# Altium PCB ProPrj_HTXStudio_OneHanded_Keyboard(1).PcbDoc (part 10 of 11)
Units mm, origin at the board's own origin, x right, y up, seen from the top; angles counter-clockwise.
Board outline 152.4 x 101.6 mm, 20 copper layers (F.Cu, F.Mask, B.Cu, B.Mask, In1.Cu, F.SilkS, In2.Cu, B.SilkS, F.Adhes, B.Adhes, F.Paste, B.Paste, Dwgs.User, Cmts.User, Eco1.User, Eco2.User, Edge.Cuts, Margin, B.CrtYd, F.CrtYd); 269 components, 0 nets, 747 pads, 1168 vias.
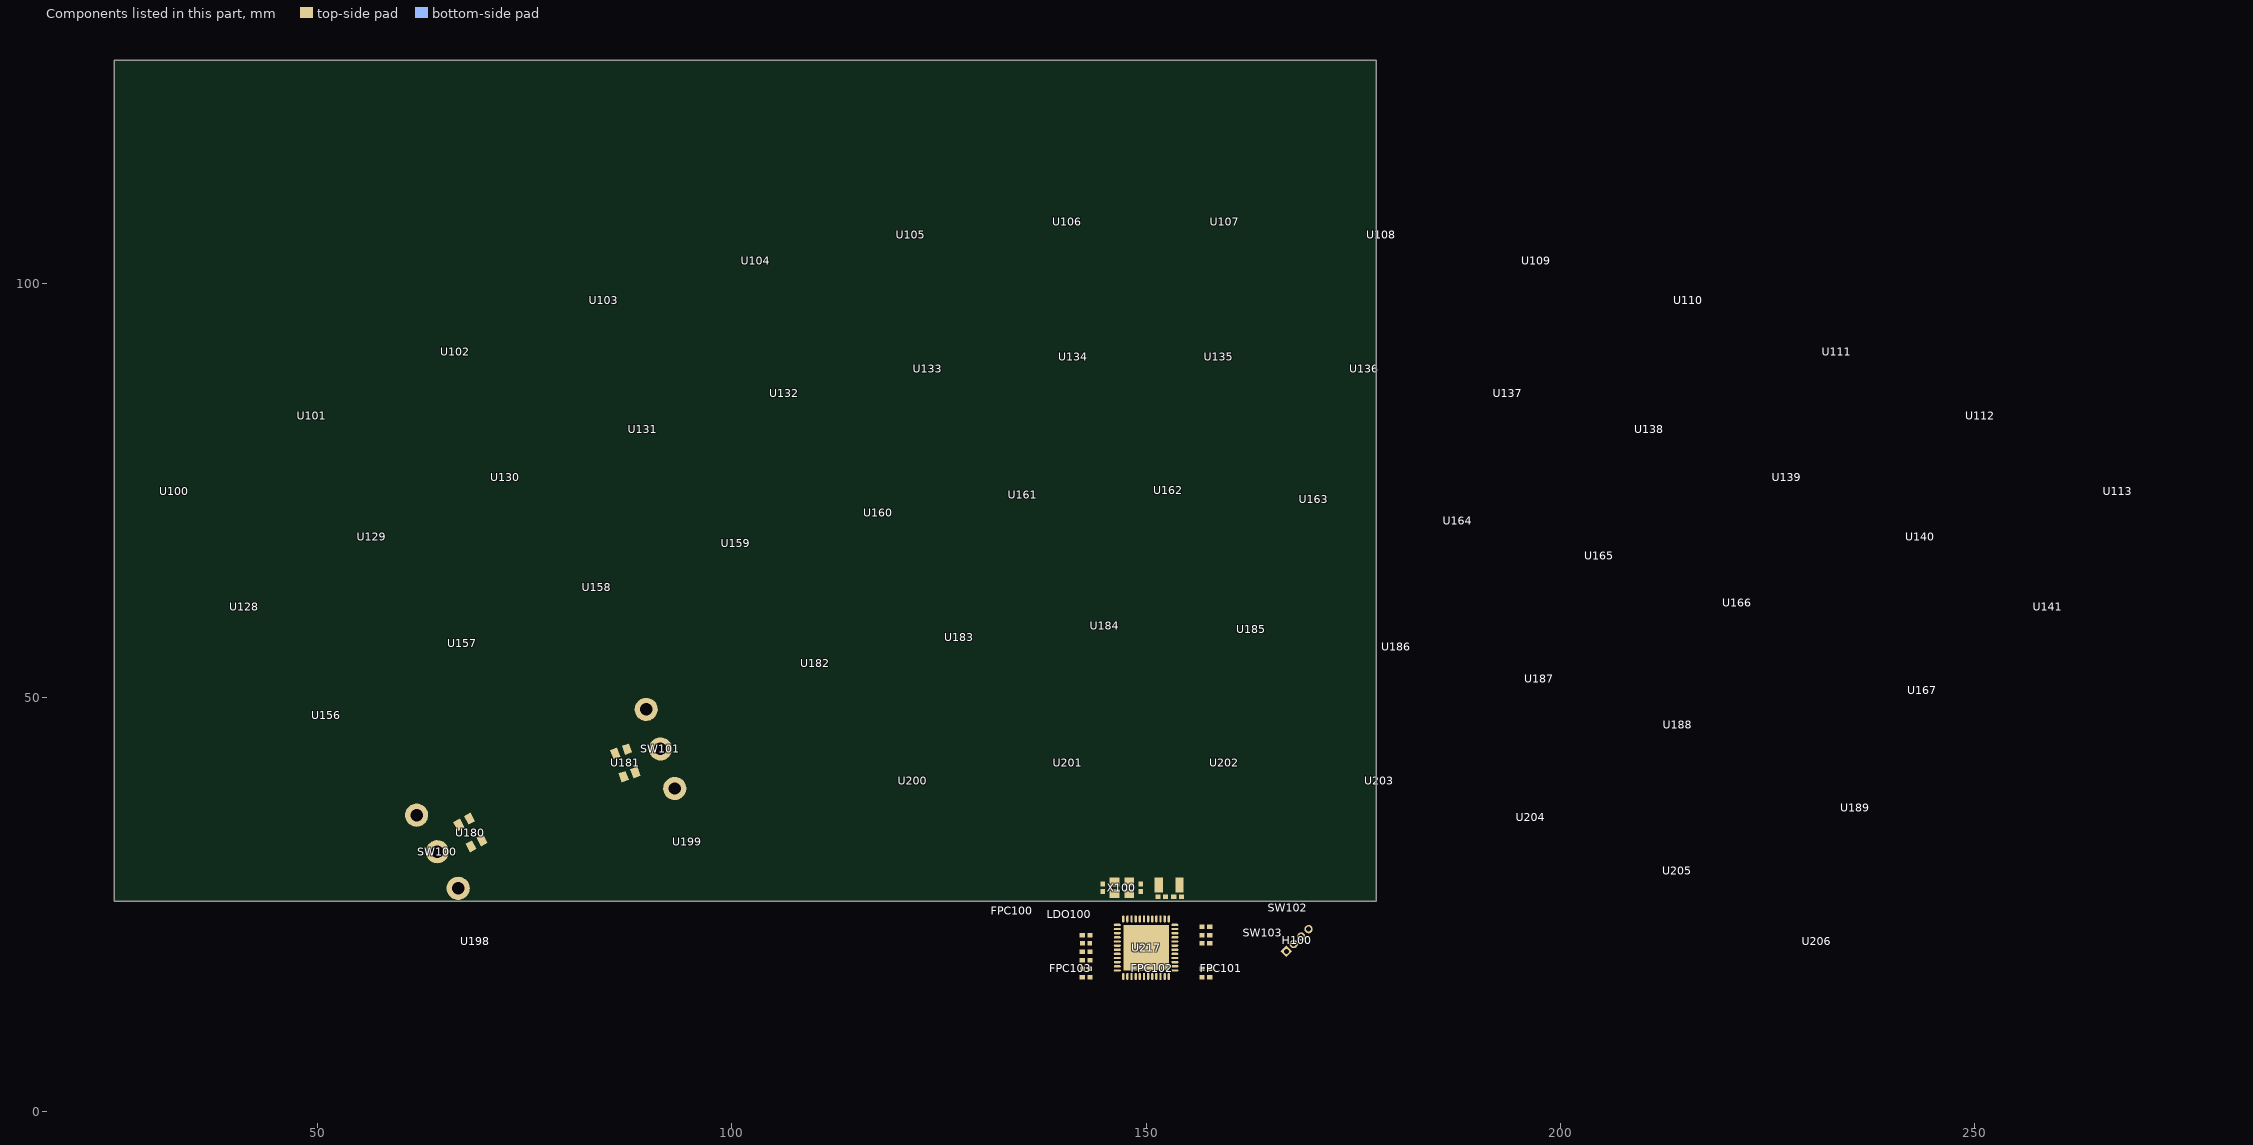
[diagram p22: the components of this part, seen from the top]

## Via types
v1: diameter 0.5, hole 0.3, F.Cu to B.Cu, tented both sides, 1168 vias

## Nets (pads, with @x,y where several pads share a name; then routed paths per layer and width w, separated by ;. In a path a pad name is that pad's centre, name@x,y a point inside that pad or via, vN(x,y) a via of type N, cw(c..) or ccw(c..) an arc to the next point about the centre after c; other vN are vias at no path point) (continued)
copper on no net: (continued)
  Eco2.User w0.254: 31.728,59.777 cw(c150.022,-118.903) 46.478,68.71 ; 31.728,59.777 cw(c150.022,-118.903) 46.478,68.71 ; 31.728,59.777 23.246,72.59 cw(c149.958,-118.802) 39.054,82.164 46.478,68.711 ; 40.737,46.17 cw(c149.966,-118.815) 54.361,54.421 ; 40.737,46.17 cw(c149.966,-118.815) 54.361,54.421 ; 40.737,46.17 32.249,58.991 cw(c149.952,-118.793) 46.931,67.883 54.361,54.421 ; 47.092,69.047 cw(c150.012,-118.893) 62.538,76.715 ; 47.092,69.047 cw(c150.012,-118.893) 62.538,76.715 ; 47.092,69.047 39.711,82.525 cw(c149.942,-118.757) 56.265,90.743 62.538,76.715 ; 49.746,32.562 cw(c150.006,-118.879) 65.007,41.625 ; 49.746,32.562 cw(c150.006,-118.879) 65.007,41.625 ; 49.746,32.562 41.251,45.393 cw(c150.02,-118.9) 57.805,55.224 65.006,41.625 ; 54.93,54.734 cw(c149.982,-118.835) 69.197,61.816 ; 54.93,54.734 cw(c149.982,-118.835) 69.197,61.816 ; 54.93,54.734 47.545,68.22 cw(c150.04,-118.946) 62.92,75.852 69.197,61.816 ; 58.754,18.954 cw(c149.999,-118.867) 104.508,40.038 ; 58.754,18.954 cw(c149.999,-118.867) 104.508,40.038 ; 58.754,18.954 50.253,31.796 cw(c149.994,-118.858) 100.268,54.844 104.507,40.039 ; 63.177,77 cw(c150.013,-118.899) 79.21,83.348 ; 63.177,77 cw(c150.013,-118.899) 79.21,83.348 ; 63.177,77 56.95,91.048 cw(c149.953,-118.757) 74.133,97.851 79.21,83.348 ; 65.595,41.935 cw(c150.051,-118.97) 79.902,48.668 ; 65.595,41.935 cw(c150.051,-118.97) 79.902,48.668 ; 65.595,41.935 58.444,55.56 cw(c150.041,-118.952) 73.963,62.863 79.902,48.668 ; 68.082,5.558 cw(c149.99,-118.852) 82.504,13.935 ; 68.082,5.558 cw(c149.99,-118.852) 82.504,13.935 ; 68.083,5.558 59.605,18.434 cw(c150.045,-118.942) 75.52,27.678 82.505,13.935 ; 69.791,62.08 cw(c149.979,-118.819) 84.6,67.944 ; 69.791,62.08 cw(c149.979,-118.819) 84.6,67.944 ; 69.791,62.08 63.559,76.137 cw(c150.015,-118.905) 79.519,82.457 84.6,67.944 ; 79.872,83.578 cw(c149.988,-118.833) 96.38,88.562 ; 79.872,83.578 cw(c149.988,-118.833) 96.38,88.562 ; 79.871,83.578 74.841,98.098 cw(c149.991,-118.841) 92.534,103.439 96.379,88.562 ; 80.516,48.924 cw(c149.922,-118.667) 95.375,54.331 ; 80.516,48.924 cw(c149.922,-118.667) 95.375,54.331 ; 80.516,48.924 74.63,63.14 cw(c150.002,-118.874) 90.746,69.006 95.375,54.331 ; 83.159,14.265 cw(c150.003,-118.876) 115.119,25.961 ; 83.159,14.265 cw(c150.003,-118.876) 115.119,25.961 ; 83.159,14.265 76.242,28.043 cw(c150.011,-118.894) 111.509,40.949 115.119,25.962 ; 85.213,68.157 cw(c150.043,-119.002) 100.461,72.761 ; 85.213,68.157 cw(c150.043,-119.002) 100.461,72.761 ; 85.213,68.157 80.18,82.686 cw(c149.994,-118.85) 96.613,87.648 100.461,72.761 ; 96.01,54.53 cw(c150.013,-118.915) 111.297,58.569 ; 96.01,54.53 cw(c150.013,-118.915) 111.297,58.569 ; 96.01,54.53 91.435,69.222 cw(c149.976,-118.784) 108.018,73.604 111.297,58.569 ; 97.058,88.736 cw(c149.96,-118.698) 113.925,92.321 ; 97.058,88.736 cw(c149.96,-118.698) 113.925,92.321 ; 97.057,88.736 93.26,103.626 cw(c150.017,-118.94) 111.338,107.468 113.925,92.321 ; 101.091,72.923 cw(c149.983,-118.794) 116.67,76.234 ; 101.091,72.923 cw(c149.983,-118.794) 116.67,76.234 ; 101.09,72.923 97.29,87.822 cw(c149.993,-118.837) 114.081,91.391 116.67,76.234 ; 105.204,40.236 cw(c150.021,-118.951) 120.518,43.771 ; 105.204,40.236 cw(c150.021,-118.951) 120.518,43.771 ; 105.204,40.236 101.03,55.06 cw(c149.963,-118.726) 117.771,58.925 120.518,43.771 ; 111.948,58.71 cw(c149.976,-118.743) 127.538,61.347 ; 111.948,58.71 cw(c149.976,-118.743) 127.538,61.347 ; 111.948,58.71 108.724,73.756 cw(c150.023,-118.989) 125.635,76.617 127.538,61.347 ; 114.615,92.438 cw(c149.974,-118.695) 131.723,94.599 ; 114.615,92.438 cw(c149.974,-118.695) 131.723,94.599 ; 114.615,92.438 112.078,107.593 cw(c150.025,-119.037) 130.412,109.91 131.724,94.599 ; 115.832,26.131 cw(c150.024,-118.986) 132.255,29.042 ; 115.832,26.131 cw(c150.024,-118.986) 132.255,29.042 ; 115.832,26.131 112.296,41.137 cw(c149.986,-118.802) 130.418,44.348 132.255,29.042 ; 117.311,76.343 cw(c150.007,-118.919) 133.113,78.34 ; 117.311,76.343 cw(c150.007,-118.919) 133.113,78.34 ; 117.31,76.343 114.771,91.508 cw(c150,-118.869) 131.801,93.66 133.113,78.339 ; 121.227,43.898 cw(c150.003,-118.887) 136.817,45.895 ; 121.227,43.898 cw(c150.003,-118.887) 136.817,45.895 ; 121.227,43.898 118.547,59.064 cw(c150.004,-118.892) 135.589,61.247 136.817,45.895 ; 128.199,61.428 cw(c150.003,-118.898) 143.964,62.641 ; 128.199,61.428 cw(c150.003,-118.898) 143.964,62.641 ; 128.199,61.428 126.351,76.704 cw(c149.987,-118.737) 143.453,78.02 143.964,62.641 ; 132.421,94.658 cw(c149.996,-118.797) 149.65,95.38 ; 132.421,94.658 cw(c149.996,-118.797) 149.65,95.38 ; 132.421,94.658 131.16,109.972 cw(c150.003,-118.915) 149.625,110.747 149.65,95.38 ; 132.983,29.127 cw(c149.995,-118.816) 149.633,30.102 ; 132.983,29.127 cw(c149.995,-118.816) 149.633,30.102 ; 132.983,29.127 131.222,44.443 cw(c149.998,-118.842) 149.595,45.518 149.632,30.102 ; 133.76,78.393 cw(c149.996,-118.808) 149.674,79.06 ; 133.76,78.393 cw(c149.996,-118.808) 149.674,79.06 ; 133.76,78.393 132.499,93.718 cw(c150.003,-118.923) 149.649,94.437 149.674,79.06 ; 137.536,45.951 cw(c149.995,-118.772) 153.247,46.39 ; 137.536,45.951 cw(c149.995,-118.772) 153.247,46.39 ; 137.536,45.951 136.374,61.308 cw(c150.009,-119.041) 153.549,61.788 153.247,46.39 ; 144.63,62.662 cw(c149.999,-118.8) 160.44,62.441 ; 144.63,62.662 cw(c149.999,-118.8) 160.44,62.441 ; 144.629,62.662 144.174,78.042 cw(c150,-118.906) 161.324,77.803 160.439,62.441 ; 150.324,79.06 cw(c149.995,-119.113) 166.238,78.394 ; 150.324,79.06 cw(c149.995,-119.113) 166.238,78.394 ; 150.323,79.06 150.349,94.437 cw(c150.004,-118.691) 167.499,93.718 166.238,78.394 ; 150.35,95.38 cw(c149.998,-118.936) 167.579,94.658 ; 150.35,95.38 cw(c149.998,-118.936) 167.579,94.658 ; 150.35,95.38 150.375,110.746 cw(c150.001,-118.817) 168.84,109.972 167.579,94.658 ; 150.366,30.102 cw(c150,-118.868) 167.016,29.127 ; 150.366,30.102 cw(c150,-118.868) 167.016,29.127 ; 150.366,30.102 150.403,45.518 cw(c150.001,-118.824) 168.777,44.443 167.016,29.127 ; 153.968,46.374 cw(c150.004,-118.792) 169.644,45.25 ; 153.968,46.374 cw(c150.004,-118.792) 169.644,45.25 ; 153.968,46.374 154.337,61.77 cw(c150,-118.871) 171.474,60.542 169.644,45.25 ; 161.104,62.402 cw(c149.984,-119.057) 176.829,60.749 ; 161.104,62.402 cw(c149.984,-119.057) 176.829,60.749 ; 161.104,62.401 162.045,77.76 cw(c150.003,-118.837) 179.102,75.967 176.829,60.749 ; 167.744,29.042 cw(c150.008,-118.816) 184.166,26.131 ; 167.744,29.042 cw(c150.008,-118.816) 184.166,26.131 ; 167.744,29.042 169.58,44.349 cw(c149.995,-118.899) 187.702,41.137 184.166,26.131 ; 168.199,93.659 cw(c150,-118.868) 185.229,91.508 ; 168.199,93.659 cw(c150,-118.868) 185.229,91.508 ; 168.199,93.659 166.887,78.339 cw(c150.005,-118.818) 182.689,76.343 185.229,91.508 ; 168.277,94.599 cw(c149.982,-119.04) 185.385,92.438 ; 168.277,94.599 cw(c149.982,-119.04) 185.385,92.438 ; 168.277,94.599 169.587,109.91 cw(c150.019,-118.696) 187.922,107.593 185.385,92.438 ; 170.359,45.163 cw(c150.016,-118.764) 185.847,42.488 ; 170.359,45.163 cw(c150.016,-118.764) 185.847,42.488 ; 170.359,45.163 172.257,60.446 cw(c149.999,-118.878) 189.187,57.522 185.847,42.488 ; 177.488,60.649 cw(c150.02,-118.754) 192.998,57.578 ; 177.488,60.649 cw(c150.02,-118.754) 192.998,57.578 ; 177.488,60.649 179.816,75.859 cw(c149.996,-118.889) 196.641,72.528 192.998,57.578 ; 184.88,25.962 cw(c150.001,-118.863) 200.85,21.155 ; 184.88,25.962 cw(c150.001,-118.863) 200.85,21.155 ; 184.88,25.962 188.489,40.95 cw(c150.003,-118.857) 206.113,35.646 200.85,21.155 ; 185.919,91.391 cw(c149.994,-118.9) 202.71,87.822 ; 185.919,91.391 cw(c149.994,-118.9) 202.71,87.822 ; 185.919,91.391 183.33,76.234 cw(c149.986,-118.944) 198.909,72.923 202.71,87.822 ; 186.075,92.321 cw(c149.968,-119.036) 202.943,88.736 ; 186.075,92.321 cw(c149.968,-119.036) 202.943,88.736 ; 186.075,92.321 188.663,107.468 cw(c150.015,-118.793) 206.74,103.626 202.942,88.736 ; 186.551,42.33 cw(c149.981,-118.944) 201.696,38.13 ; 186.551,42.33 cw(c149.981,-118.944) 201.696,38.13 ; 186.551,42.33 189.956,57.349 cw(c150.001,-118.864) 206.512,52.758 201.695,38.13 ; 193.645,57.419 cw(c149.962,-119.009) 208.813,52.955 ; 193.645,57.419 cw(c149.962,-119.009) 208.813,52.955 ; 193.644,57.419 197.342,72.355 cw(c149.961,-119.011) 213.796,67.513 208.813,52.955 ; 201.539,20.903 cw(c149.99,-118.893) 216.84,14.266 ; 201.539,20.903 cw(c149.99,-118.893) 216.84,14.266 ; 201.538,20.903 206.872,35.368 cw(c150.027,-118.801) 223.756,28.044 216.84,14.266 ; 202.38,37.903 cw(c149.982,-118.918) 217.033,32.219 ; 202.38,37.903 cw(c149.982,-118.918) 217.033,32.219 ; 202.38,37.903 207.26,52.51 cw(c150.058,-118.708) 223.278,46.296 217.033,32.219 ; 203.387,87.648 cw(c149.995,-118.888) 219.82,82.686 ; 203.387,87.648 cw(c149.995,-118.888) 219.82,82.686 ; 203.387,87.648 199.539,72.761 cw(c150.038,-118.735) 214.787,68.158 219.82,82.686 ; 203.621,88.562 cw(c149.991,-118.902) 220.129,83.578 ; 203.621,88.562 cw(c149.991,-118.902) 220.129,83.578 ; 203.62,88.562 207.466,103.439 cw(c149.993,-118.892) 225.159,98.098 220.129,83.578 ; 209.442,52.738 cw(c149.942,-119.024) 224.143,46.918 ; 209.442,52.738 cw(c149.942,-119.024) 224.143,46.918 ; 209.442,52.738 214.478,67.278 cw(c150.003,-118.859) 230.426,60.964 224.143,46.917 ; 217.494,13.935 cw(c150.017,-118.837) 231.916,5.558 ; 217.494,13.935 cw(c150.017,-118.837) 231.916,5.558 ; 217.494,13.935 224.478,27.679 cw(c149.969,-118.925) 240.393,18.435 231.916,5.558 ; 220.481,82.457 cw(c150.014,-118.832) 236.44,76.138 ; 220.481,82.457 cw(c150.014,-118.832) 236.44,76.138 ; 220.481,82.457 215.4,67.944 cw(c149.981,-118.919) 230.21,62.08 236.44,76.137 ; 223.993,45.977 cw(c149.981,-118.908) 249.744,31.798 ; 223.993,45.977 cw(c149.981,-118.908) 249.744,31.798 ; 223.993,45.978 217.687,31.927 cw(c149.992,-118.885) 241.243,18.956 249.744,31.798 ; 224.75,46.645 cw(c149.998,-118.872) 250.254,32.563 ; 224.75,46.645 cw(c149.998,-118.872) 250.254,32.563 ; 224.751,46.644 231.084,60.668 cw(c150.013,-118.843) 258.749,45.393 250.254,32.562 ; 225.867,97.851 cw(c149.959,-118.979) 243.05,91.048 ; 225.867,97.851 cw(c149.959,-118.979) 243.05,91.048 ; 225.867,97.851 220.79,83.348 cw(c150.013,-118.833) 236.823,77 243.05,91.048 ; 237.08,75.852 cw(c150.037,-118.789) 252.455,68.22 ; 237.08,75.852 cw(c150.037,-118.789) 252.455,68.22 ; 237.08,75.853 230.803,61.816 cw(c149.984,-118.903) 245.069,54.734 252.455,68.22 ; 243.735,90.743 cw(c149.949,-118.977) 260.289,82.526 ; 243.735,90.743 cw(c149.949,-118.977) 260.289,82.526 ; 243.735,90.742 237.462,76.715 cw(c150.013,-118.842) 252.909,69.047 260.289,82.525 ; 253.069,67.883 cw(c149.956,-118.945) 267.751,58.991 ; 253.069,67.883 cw(c149.956,-118.945) 267.751,58.991 ; 253.069,67.883 245.639,54.421 cw(c149.969,-118.923) 259.263,46.17 267.751,58.991 ; 260.946,82.164 cw(c149.962,-118.934) 276.754,72.59 ; 260.946,82.164 cw(c149.962,-118.934) 276.754,72.59 ; 260.947,82.164 253.522,68.711 cw(c150.022,-118.831) 268.272,59.777 276.755,72.59
  Edge.Cuts w0.254: 21.522,71.608 cw(c23.204,72.888) 22.023,74.64 cw(c150,-118.868) 277.986,74.634 cw(c276.796,72.888) 278.479,71.608 232.268,3.098 cw(c231.103,3.876) 230.249,2.766 ccw(c150.001,-118.865) 174.072,24.851 163.005,13.783 137.005,13.783 125.935,24.852 ccw(c150,-118.868) 69.751,2.766 cw(c68.897,3.875) 67.732,3.098 21.521,71.608
  other v1: 70.117,4.83 72.809,5.529 66.815,5.973 227.724,6.227 232.042,7.497 65.545,7.624 221.882,9.275 74.49,9.948 228.994,10.418 218.199,11.053 226.327,11.307 84.176,11.761 69.228,12.831 78.245,12.831 75.324,13.466 210.798,14.175 146.866,14.708 147.543,14.708 148.222,14.708 148.9,14.708 236.614,14.863 139.92,15.117 140.535,15.117 141.151,15.117 141.765,15.117 86.061,15.304 159.344,15.334 231.661,15.625 225.184,15.752 92.839,15.777 159.037,15.879 159.652,15.879 160.267,15.879 65.164,16.133 84.087,16.133 164.033,16.242 135.522,16.26 239.916,16.895 204.107,17.033 134.252,17.53 140.924,17.616 137.591,17.653 147.562,17.739 148.177,17.739 148.792,17.739 149.407,17.739 150.022,17.739 150.637,17.739 152.285,17.759 163.047,17.911 163.662,17.911 164.277,17.911 164.892,17.911 221.882,18.038 89.051,18.176 152.354,18.374 214.262,18.419 58.179,18.546 86.881,18.546 62.497,18.673 64.783,18.927 197.666,19.425 210.198,19.435 102.39,19.463 131.966,19.689 235.471,19.816 134.433,19.842 164.634,20.214 133.998,20.277 152.337,20.386 137.935,20.578 165.069,20.649 158.188,20.984 137.5,21.012 152.337,21.001 74.435,21.086 165.504,21.084 60.846,21.213 192.044,21.236 137.065,21.447 83.833,21.594 211.087,21.594 152.337,21.616 138.362,21.804 197.086,21.808 130.061,21.848 142.281,21.843 223.533,22.102 148.033,22.23 148.648,22.23 149.263,22.23 149.878,22.23 150.492,22.23 151.107,22.23 151.722,22.23 152.337,22.23 111.385,22.254 138.362,22.419 104.029,22.488 187.358,22.557 55.512,22.61 88.278,22.737 129.133,22.775 72.53,22.864 237.122,22.864 242.202,22.864 138.362,23.033 77.483,23.118 128.699,23.21 99.835,23.245 128.264,23.645 135.584,23.648 138.362,23.648 200.703,23.749 162.995,23.787 167.419,23.952 220.866,24.007 127.829,24.079 227.216,24.134 163.429,24.349 167.853,24.388 168.468,24.388 120.531,24.409 169.968,24.435 127.394,24.515 94.12,24.769 129.68,24.769 61.608,25.023 153.937,25.023 216.802,25.023 151.864,25.049 176.066,25.067 205.118,25.15 151.07,25.213 193.942,25.277 80.503,25.38 128.918,25.404 172.946,25.416 114.705,25.489 144.158,25.531 155.842,25.531 130.061,25.658 143.269,25.658 74.128,25.691 223.684,26.115 235.598,26.166 156.096,26.547 210.198,27.182 195.129,27.253 85.103,27.436 156.223,27.436 231.407,27.436 152.776,27.544 142.888,27.69 89.41,27.804 112.027,27.817 80.023,28.198 156.223,28.198 108.344,28.452 144.156,28.608 180.866,28.709 69.863,28.833 142.634,29.087 150.508,29.087 159.652,29.087 123.965,29.214 155.715,29.214 201.816,29.214 245.504,29.214 92.977,29.341 153.937,29.468 73.165,29.595 127.394,29.595 83.706,29.722 178.194,29.722 57.544,29.849 191.021,29.849 127.648,30.357 54.242,30.484 75.832,30.484 161.43,30.611 162.192,30.611 162.954,30.611 242.71,30.738 187.741,30.821 113.043,30.865 164.351,30.865 140.729,30.935 141.491,30.935 142.253,30.935 143.015,30.935 143.777,30.935 157.874,30.992 154.361,31.119 147.432,31.5 221.755,31.627 141.11,31.754 141.872,31.754 142.634,31.754 143.396,31.754 239.408,31.754 249.568,31.754 129.807,32.008 88.659,32.135 176.289,32.135 147.432,32.234 71.514,32.262 198.006,32.389 203.706,32.389 60.719,32.516 73.927,32.516 79.642,32.516 229.987,32.596 164.097,32.643 124.092,32.77 160.414,32.897 220.739,32.897 147.432,32.968 102.629,33.024 107.113,33.024 206.896,33.532 171.336,33.659 192.799,33.786 225.819,33.786 68.441,33.921 72.784,33.913 216.294,34.167 98.438,34.294 135.014,34.294 205.88,34.294 159.15,34.359 200.546,34.421 218.707,34.675 241.948,34.675 142.126,34.929 80.531,35.183 112.893,35.203 58.433,35.31 151.524,35.31 184.447,35.32 153.429,35.437 136.919,35.564 155.334,35.818 168.669,35.818 231.407,36.072 119.973,36.453 125.87,36.453 180.635,36.561 224.295,36.707 71.641,36.834 100.851,36.834 211.595,36.834 187.537,36.996 76.213,37.088 173.749,37.723 185.433,37.85 66.434,37.977 221.247,38.231 225.438,38.358 128.156,38.485 161.938,38.485 192.037,38.485 89.929,38.612 130.061,38.739 65.291,38.866 84.595,38.866 228.105,38.866 57.671,38.993 109.289,38.993 110.023,38.993 110.757,38.993 111.491,38.993 112.226,38.993 250.203,39.12 165.216,39.155 168.326,39.252 188.163,39.598 135.014,39.628 144.412,39.628 95.644,39.755 148.349,39.882 156.35,39.882 51.194,40.009 75.07,40.009 200.165,40.263 78.499,40.39 130.631,40.558 43.193,40.644 153.683,40.644 225.819,40.644 230.899,40.644 117.361,40.771 68.847,40.898 128.81,40.932 239.789,41.025 55.004,41.152 151.27,41.152 252.108,41.66 199.784,41.787 222.39,41.914 163.589,42.041 194.45,42.041 61.481,42.168 136.538,42.168 227.978,42.168 206.678,42.34 130.601,42.374 144.666,42.549 172.86,42.549 82.436,42.676 72.276,42.803 216.04,42.803 168.796,42.93 96.509,43.042 240.424,43.184 255.283,43.184 247.597,43.402 133.49,43.438 48.665,43.498 152.413,43.692 100.089,43.819 162.446,43.819 143.142,44.2 148.163,44.2 196.209,44.23 224.676,44.327 112.027,44.708 77.61,44.962 116.345,45.343 89.294,45.597 183.782,45.597 44.463,45.724 220.993,46.105 178.508,46.177 250.457,46.359 46.495,46.486 236.868,46.613 119.562,46.644 207.793,46.722 55.766,46.74 180.353,46.74 253.935,46.786 102.901,46.949 167.272,47.121 229.375,47.121 246.266,47.121 259.963,47.226 190.259,47.248 163.208,47.502 133.591,47.623 102.901,47.683 144.666,47.756 108.344,47.883 128.537,47.883 204.483,48.137 225.504,48.314 43.52,48.345 102.901,48.418 147.333,48.645 199.149,48.645 66.66,48.772 71.641,48.772 93.993,48.899 152.032,48.899 247.409,49.026 102.901,49.152 249.822,49.153 121.806,49.28 125.205,49.496 222.771,49.534 76.34,49.661 187.652,49.645 209.436,49.661 172.479,49.788 234.201,49.788 102.901,49.886 97.168,50.169 54.496,50.296 36.555,50.417 239.789,50.55 105.423,50.677 192.291,50.677 57.671,50.804 163.081,50.931 176.289,50.931 155.334,51.058 230.518,51.185 201.435,51.312 140.221,51.439 158.763,51.439 61.227,51.82 205.245,51.82 236.487,51.82 255.029,51.947 113.805,52.328 218.834,52.582 41.542,52.836 65.799,52.963 100.038,53.075 100.772,53.075 101.506,53.075 102.24,53.075 183.528,53.217 188.735,53.217 122.568,53.471 117.742,53.598 240.17,53.598 172.972,53.984 34.175,54.061 176.289,54.039 87.516,54.106 234.201,54.106 48.781,54.233 227.285,54.512 124.854,54.614 105.042,54.741 152.159,54.741 237.63,54.868 114.059,55.249 132.601,55.249 159.271,55.249 165.494,55.249 61.735,55.376 91.707,55.503 170.066,55.63 184.417,55.63 71.895,55.757 138.973,55.884 142.38,55.884 205.626,55.884 209.563,55.884 83.452,56.011 265.316,56.138 148.73,56.265 87.389,56.392 208.039,56.519 215.532,56.519 260.363,56.646 187.719,56.773 158.255,56.79 153.917,56.88 39.225,56.951 156.35,57.027 223.295,57.073 75.324,57.281 137.681,57.281 202.959,57.535 123.076,57.662 242.959,57.662 246.393,57.662 253.124,57.662 119.393,57.789 233.693,57.789 36.97,57.916 131.585,57.916 120.79,58.043 249.949,58.043 229.2,58.225 174.384,58.424 71.133,58.551 232.042,58.678 265.394,58.805 140.475,58.932 149.238,58.932 158.255,58.932 68.974,59.313 54.369,59.821 201.816,59.821 79.896,59.948 108.217,59.948 190.819,59.987 225.438,60.075 45.098,60.329 139.078,60.329 37.203,60.451 96.942,60.583 97.676,60.583 98.41,60.583 99.145,60.583 151.987,60.686 61.989,60.71 240.551,60.837 103.01,60.964 110.333,61.433 215.405,61.472 253.124,61.534 87.77,61.599 187.084,61.599 198.006,61.853 268.11,61.853 47.765,62.107 58.941,62.107 65.418,62.234 174.642,62.507 78.753,62.742 124.727,62.869 44.463,63.377 209.182,63.377 217.691,63.758 230.137,63.758 120.409,64.012 238.138,64.139 96.531,64.21 152.642,64.277 255.029,64.393 250.496,64.642 246.266,64.774 87.516,64.901 91.58,64.901 137.83,64.901 141.491,64.901 228.359,65.028 114.567,65.155 181.75,65.282 52.464,65.409 170.32,65.409 200.8,65.409 233.928,65.501 153.683,65.663 97.168,65.79 109.233,65.917 26.937,66.044 225.184,66.044 263.538,66.044 273.698,66.044 46.146,66.128 208.833,66.371 55.385,66.425 252.489,66.425 212.103,66.679 135.483,66.843 38.781,67.013 104.026,67.187 130.569,67.187 69.482,67.695 77.483,67.695 165.843,67.75 247.371,67.765 60.719,67.822 190.513,67.822 93.347,68.15 249.949,68.203 148.984,68.33 239.408,68.33 81.293,68.965 109.868,68.965 114.821,68.965 42.177,69.092 178.571,69.153 96.66,69.346 200.419,69.473 271.158,69.6 183.147,69.727 214.616,69.727 104.407,69.854 273.571,69.981 24.666,70.445 121.679,70.489 260.617,70.489 252.997,70.616 268.406,70.91 212.484,71.124 276.492,71.124 234.246,71.187 173.368,71.378 125.802,71.391 195.339,71.505 221.882,71.505 64.275,71.632 129.934,71.759 149.873,71.759 129.045,71.886 142.507,71.886 156.096,71.886 164.28,71.886 165.014,71.886 165.748,71.886 166.482,71.886 167.217,71.886 106.797,72.051 258.458,72.267 250.203,72.394 92.511,72.526 255.681,72.522 113.17,72.648 138.951,72.648 209.411,72.717 69.99,72.775 229.756,72.775 239.916,72.775 92.511,73.26 183.401,73.283 263.157,73.537 146.698,73.664 97.549,73.791 174.511,73.791 92.511,73.994 236.487,74.172 62.243,74.426 128.283,74.553 46.089,74.716 92.511,74.728 130.315,74.807 177.559,74.934 196.863,74.934 156.985,75.188 166.002,75.188 223.152,75.188 247.663,75.188 258.204,75.188 76.721,75.315 124.6,75.315 54.496,75.442 92.511,75.463 148.095,75.696 218.133,75.75 39.129,75.823 67.831,76.077 159.271,76.712 141.966,76.787 108.852,76.966 81.041,76.991 192.736,77.023 48.82,77.093 58.433,77.093 205.499,77.22 260.365,77.327 112.662,77.347 271.412,77.855 256.299,78.109 41.237,78.208 86.881,78.871 108.217,78.998 263.665,78.998 176.345,79.125 177.079,79.125 177.813,79.125 178.547,79.125 179.282,79.125 213.373,79.125 44.971,79.252 104.28,79.252 183.714,79.31 130.802,79.778 244.969,79.862 126.886,79.887 221.882,79.887 201.463,80.204 243.091,80.268 141.745,80.395 219.822,80.575 39.411,80.626 265.951,80.649 187.973,80.776 78.626,80.903 48.527,81.03 146.571,81.03 235.09,81.03 160.414,81.538 204.737,81.665 96.279,81.792 230.137,81.792 143.523,82.046 149.54,82.267 257.95,82.3 43.828,82.554 121.679,82.554 71.476,82.771 241.059,82.808 63.005,82.935 52.718,83.062 84.214,83.062 103.01,83.443 171.971,83.57 197.117,83.57 135.776,83.697 139.459,83.824 201.698,83.859 40.029,84.071 75.451,84.078 260.363,84.078 155.08,84.332 57.036,84.84 189.497,84.84 186.703,85.348 79.515,85.602 202.912,85.811 205.375,85.811 242.71,85.983 220.485,86.11 95.771,86.237 256.68,86.237 60.084,86.618 115.271,86.603 183.274,86.618 148.387,86.794 120.028,86.872 179.845,86.872 225.438,86.872 127.521,87.126 101.105,87.253 247.155,87.38 240.499,87.42 166.002,87.634 170.32,88.015 214.127,88.107 130.442,88.142 245.123,88.142 134.887,88.269 137.968,88.269 234.836,88.269 155.461,88.396 87.897,88.451 65.164,88.523 251.727,88.523 87.897,89.185 149.492,89.285 57.163,89.412 180.48,89.412 188.481,89.412 80.404,89.666 92.723,89.666 132.138,89.721 87.897,89.92 60.719,90.555 117.742,90.555 183.782,90.555 87.897,90.654 223.54,90.641 228.993,90.641 171.463,91.317 87.897,91.388 105.804,92.079 74.816,92.333 154.064,92.587 210.325,92.968 225.057,93.095 149.651,93.112 196.482,93.222 220.358,93.73 78.454,93.884 229.375,94.238 96.025,94.365 105.252,94.365 82.563,94.619 177.615,95.381 178.349,95.381 179.083,95.381 179.817,95.381 180.552,95.381 100.724,95.762 227.978,95.762 234.836,95.762 88.532,95.889 66.872,96.255 123.584,96.651 192.545,96.651 77.108,96.898 141.872,97.286 145.202,97.286 177.808,97.341 79.515,97.54 92.215,97.794 160.541,98.048 206.769,98.048 188.442,98.152 114.694,98.302 72.149,98.683 95.263,98.81 98.595,98.81 118.885,98.937 226.708,98.937 140.348,99.064 200.8,99.191 171.463,99.699 77.108,100.025 136.919,100.461 155.588,100.969 210.579,101.096 132.601,101.35 219.215,101.35 190.132,101.985 110.757,102.493 182.893,102.493 169.431,102.62 97.717,102.748 115.456,102.874 211.976,103.636 106.947,103.763 126.251,103.89 165.621,104.779 95.673,105.355 131.204,105.414 152.667,105.668 202.76,105.688 85.23,107.192 173.749,107.7 105.423,107.954 146.698,108.081 134.89,108.156 153.81,108.589 185.663,109.078 148.349,109.351 172.733,110.875 136.411,111.637 155.327,111.729 147.587,112.018

## Polygon pours and split planes (outlines as drawn)
no net on F.Cu "F.Cu--49" (solid, remove dead copper, pour order 861): 79.382,33.437 79.166,33.652 79.202,33.686 79.233,33.719 79.255,33.756 79.262,33.777 79.266,33.801 79.53,33.536 79.507,33.532 79.486,33.525 79.449,33.503 79.416,33.472
no net on F.Cu "F.Cu--48" (solid, remove dead copper, pour order 860): 145.94,17.964 145.94,18.167 146.048,18.173 146.14,18.186 146.245,18.205 146.245,17.925 146.14,17.944 146.048,17.958
no net on F.Cu "F.Cu--47" (solid, remove dead copper, pour order 859): 22 vertices, not listed, extent 152.894,16.056 153.199,16.522
no net on F.Cu "F.Cu--46" (solid, remove dead copper, pour order 858): 154.069,17.667 154.068,17.463 153.978,17.457 153.916,17.444 153.855,17.431 153.815,17.427 153.763,17.425 153.765,17.705 153.855,17.699 153.917,17.686 153.979,17.672
no net on F.Cu "F.Cu--45" (solid, remove dead copper, pour order 857): 20 vertices, not listed, extent 150.127,25.795 150.694,26.089
no net on F.Cu "F.Cu--44" (solid, remove dead copper, pour order 856): 17 vertices, not listed, extent 143.726,25.429 144.121,26.064
no net on F.Cu "F.Cu--43" (solid, remove dead copper, pour order 855): 159.54,25.571 159.337,25.571 159.33,25.619 159.31,25.664 159.283,25.708 159.251,25.746 159.626,25.746 159.594,25.708 159.567,25.664 159.547,25.619
no net on F.Cu "F.Cu--42" (solid, remove dead copper, pour order 854): 134.499,23.979 134.702,23.998 134.704,23.974 134.71,23.95 134.73,23.903 134.759,23.86 134.792,23.823 134.418,23.804 134.448,23.844 134.474,23.886 134.492,23.931
no net on F.Cu "F.Cu--41" (solid, remove dead copper, pour order 853): 20 vertices, not listed, extent 150.236,27.31 150.804,27.604
no net on F.Cu "F.Cu--40" (solid, remove dead copper, pour order 852): 17 vertices, not listed, extent 150.255,28.389 150.899,28.772
no net on F.Cu "F.Cu--39" (solid, remove dead copper, pour order 851): 144.371,17.813 144.371,17.61 144.324,17.602 144.278,17.583 144.235,17.555 144.197,17.524 144.197,17.899 144.235,17.867 144.278,17.84 144.324,17.82
no net on F.Cu "F.Cu--38" (solid, remove dead copper, pour order 850): 20 vertices, not listed, extent 150.236,27.774 150.804,28.068
no net on F.Cu "F.Cu--37" (solid, remove dead copper, pour order 849): 66.117,35.896 65.925,35.731 65.892,35.761 65.851,35.789 65.807,35.812 65.764,35.824 66.049,36.068 66.055,36.024 66.07,35.977 66.092,35.932
no net on F.Cu "F.Cu--36" (solid, remove dead copper, pour order 848): 145.94,20.964 145.94,21.167 146.048,21.173 146.14,21.186 146.245,21.205 146.245,20.925 146.14,20.944 146.048,20.958
no net on F.Cu "F.Cu--35" (solid, remove dead copper, pour order 847): 133.154,23.989 133.358,23.989 133.365,23.941 133.385,23.895 133.412,23.852 133.443,23.814 133.068,23.814 133.1,23.852 133.128,23.895 133.147,23.941
no net on F.Cu "F.Cu--34" (solid, remove dead copper, pour order 846): 20 vertices, not listed, extent 150.127,27.025 150.694,27.319
no net on F.Cu "F.Cu--33" (solid, remove dead copper, pour order 845): 161.512,25.571 161.308,25.571 161.301,25.619 161.282,25.664 161.254,25.708 161.222,25.746 161.598,25.746 161.566,25.708 161.538,25.664 161.519,25.619
no net on F.Cu "F.Cu--32" (solid, remove dead copper, pour order 844): 149.153,23.729 149.357,23.729 149.363,23.682 149.376,23.652 149.388,23.621 149.394,23.574 149.114,23.576 149.116,23.602 149.12,23.622 149.134,23.652 149.147,23.683 149.152,23.703
no net on F.Cu "F.Cu--31" (solid, remove dead copper, pour order 843): 162.253,25.571 162.05,25.571 162.043,25.619 162.024,25.664 161.996,25.708 161.964,25.746 162.339,25.746 162.308,25.708 162.28,25.664 162.261,25.619
no net on F.Cu "F.Cu--30" (solid, remove dead copper, pour order 842): 141.499,20.59 141.701,20.59 141.709,20.542 141.728,20.496 141.756,20.453 141.787,20.415 141.413,20.415 141.444,20.453 141.472,20.496 141.491,20.542
no net on F.Cu "F.Cu--29" (solid, remove dead copper, pour order 841): 139.402,20.59 139.605,20.59 139.612,20.542 139.631,20.496 139.659,20.453 139.691,20.415 139.316,20.415 139.347,20.453 139.375,20.496 139.394,20.542
no net on F.Cu "F.Cu--28" (solid, remove dead copper, pour order 840): 145.944,19.464 145.944,19.667 146.051,19.673 146.141,19.686 146.245,19.705 146.245,19.425 146.141,19.445 146.051,19.458
no net on F.Cu "F.Cu--26" (solid, remove dead copper, pour order 839): 22 vertices, not listed, extent 146.81,16.056 147.114,16.522
no net on F.Cu "F.Cu--25" (solid, remove dead copper, pour order 838): 154.039,20.196 154.097,19.993 154.006,19.987 153.944,19.973 153.883,19.952 153.793,19.928 153.735,20.202 153.805,20.208 153.886,20.205 153.968,20.199
no net on F.Cu "F.Cu--24" (solid, remove dead copper, pour order 837): 143.714,20.708 143.826,20.884 143.844,20.868 143.865,20.855 143.914,20.837 143.966,20.828 144.016,20.827 143.785,20.531 143.776,20.58 143.762,20.626 143.743,20.67
no net on F.Cu "F.Cu--23" (solid, remove dead copper, pour order 836): 21 vertices, not listed, extent 154.881,25.293 155.353,25.729
no net on F.Cu "F.Cu--22" (solid, remove dead copper, pour order 835): 140.799,20.717 141.002,20.717 141.01,20.669 141.029,20.623 141.057,20.58 141.089,20.542 140.714,20.542 140.745,20.58 140.772,20.623 140.792,20.669
no net on F.Cu "F.Cu--21" (solid, remove dead copper, pour order 834): 19 vertices, not listed, extent 149.818,28.267 150.391,28.678
no net on F.Cu "F.Cu--20" (solid, remove dead copper, pour order 833): 158.798,25.571 158.595,25.571 158.588,25.619 158.568,25.664 158.541,25.708 158.509,25.746 158.884,25.746 158.852,25.708 158.825,25.664 158.805,25.619
no net on F.Cu "F.Cu--19" (solid, remove dead copper, pour order 832): 154.069,19.105 154.069,18.902 153.96,18.905 153.869,18.913 153.764,18.925 153.764,19.205 153.801,19.189 153.869,19.155 153.912,19.137 153.96,19.12 154.013,19.109
no net on F.Cu "F.Cu--18" (solid, remove dead copper, pour order 831): 145.94,20.464 145.94,20.667 146.048,20.673 146.14,20.686 146.245,20.705 146.245,20.425 146.14,20.445 146.048,20.458
no net on F.Cu "F.Cu--17" (solid, remove dead copper, pour order 830): 160.77,25.571 160.566,25.571 160.559,25.619 160.54,25.664 160.512,25.708 160.48,25.746 160.855,25.746 160.824,25.708 160.797,25.664 160.777,25.619
no net on F.Cu "F.Cu--16" (solid, remove dead copper, pour order 829): 79.855,33.938 79.855,33.633 79.807,33.634 79.761,33.632 79.72,33.622 79.7,33.612 79.681,33.598 79.681,33.973 79.7,33.958 79.72,33.948 79.761,33.938 79.807,33.937
no net on F.Cu "F.Cu--15" (solid, remove dead copper, pour order 828): 22 vertices, not listed, extent 146.81,23.109 147.114,23.575
no net on F.Cu "F.Cu--14" (solid, remove dead copper, pour order 827): 154.069,18.167 154.069,17.964 153.96,17.958 153.869,17.944 153.764,17.925 153.764,18.205 153.869,18.186 153.96,18.173
no net on F.Cu "F.Cu--13" (solid, remove dead copper, pour order 826): 150.474,28.666 150.952,28.445 150.914,28.42 150.867,28.403 150.764,28.381 150.715,28.369 150.674,28.352 150.657,28.341 150.644,28.327 150.634,28.31 150.628,28.29 150.349,28.572 150.386,28.584 150.42,28.606 150.45,28.634
no net on F.Cu "F.Cu--12" (solid, remove dead copper, pour order 825): 154.613,20.963 154.613,21.167 154.661,21.174 154.706,21.193 154.749,21.221 154.788,21.253 154.788,20.877 154.749,20.909 154.706,20.936 154.661,20.956
no net on F.Cu "F.Cu--11" (solid, remove dead copper, pour order 824): 20 vertices, not listed, extent 150.127,25.946 150.694,26.24
no net on F.Cu "F.Cu--10" (solid, remove dead copper, pour order 823): 140.1,20.685 140.303,20.685 140.306,20.663 140.311,20.642 140.33,20.608 140.39,20.542 140.015,20.542 140.074,20.608 140.093,20.642 140.099,20.663
no net on F.Cu "F.Cu--9" (solid, remove dead copper, pour order 822): 139.243,22.339 138.937,22.339 138.939,22.388 138.937,22.433 138.927,22.475 138.917,22.495 138.903,22.514 139.277,22.514 139.263,22.495 139.253,22.475 139.243,22.433 139.241,22.388
no net on F.Cu "F.Cu--7" (solid, remove dead copper, pour order 821): 18 vertices, not listed, extent 150.127,26.41 150.694,26.591
no net on F.Cu "F.Cu--6" (solid, remove dead copper, pour order 820): 154.069,21.167 154.069,20.963 153.978,20.957 153.916,20.944 153.855,20.931 153.764,20.925 153.765,21.205 153.855,21.199 153.916,21.186 153.979,21.173
no net on F.Cu "F.Cu--5" (solid, remove dead copper, pour order 819): 133.833,23.989 134.036,23.989 134.043,23.941 134.063,23.895 134.09,23.852 134.122,23.814 133.747,23.814 133.779,23.852 133.806,23.895 133.826,23.941
no net on F.Cu "F.Cu--3" (solid, remove dead copper, pour order 818): 19 vertices, not listed, extent 150.115,27.827 150.599,28.201
no net on F.Cu "F.Cu--2" (solid, remove dead copper, pour order 817): 156.249,17.352 156.429,17.172 156.4,17.138 156.375,17.095 156.356,17.049 156.348,17.006 156.082,17.271 156.126,17.28 156.172,17.298 156.215,17.324
no net on F.Cu "F.Cu--1" (solid, remove dead copper, pour order 607): 152.605,23.86 152.605,23.008 153.204,22.408 155.072,22.408 155.304,22.176 155.304,20.173 155.734,19.743 156.909,19.743 157.112,19.946 157.112,23.201 156.306,24.007 152.75,24.007
no net on F.Cu "F.Cu-" (solid, remove dead copper, pour order 816): 18 vertices, not listed, extent 149.778,28.305 150.172,28.929
no net on B.Cu "B.Cu--230" (solid, remove dead copper, pour order 815): 62.057,40.401 61.868,40.231 61.835,40.261 61.794,40.288 61.748,40.309 61.706,40.32 61.984,40.572 61.991,40.528 62.008,40.481 62.031,40.437
no net on B.Cu "B.Cu--229" (solid, remove dead copper, pour order 814): 69.348,25.866 69.169,26.047 69.219,26.097 69.263,26.149 69.281,26.176 69.296,26.206 69.306,26.238 69.311,26.272 69.575,26.006 69.541,26.001 69.509,25.991 69.48,25.977 69.451,25.959 69.399,25.915
no net on B.Cu "B.Cu--226" (solid, remove dead copper, pour order 813): 98.477,86.953 98.717,87.142 98.746,87.104 98.775,87.069 98.809,87.043 98.83,87.033 98.852,87.027 98.558,86.794 98.558,86.818 98.554,86.84 98.535,86.879 98.508,86.915
no net on B.Cu "B.Cu--224" (solid, remove dead copper, pour order 812): 40.857,44.923 41.12,45.078 41.144,45.036 41.168,44.997 41.198,44.966 41.217,44.954 41.239,44.945 40.916,44.755 40.918,44.779 40.916,44.801 40.904,44.842 40.882,44.882
no net on B.Cu "B.Cu--218" (solid, remove dead copper, pour order 811): 160.704,63.687 160.4,63.667 160.398,63.716 160.393,63.761 160.38,63.802 160.369,63.821 160.354,63.84 160.728,63.865 160.715,63.844 160.707,63.823 160.699,63.781 160.7,63.736
no net on B.Cu "B.Cu--216" (solid, remove dead copper, pour order 810): 155.53,21.66 155.53,22.016 155.583,22.01 155.625,22 155.644,21.998 155.663,22.001 155.683,22.009 155.704,22.025 155.704,21.65 155.683,21.666 155.663,21.675 155.644,21.677 155.625,21.676 155.583,21.666
no net on B.Cu "B.Cu--215" (solid, remove dead copper, pour order 809): 65.477,36.239 65.665,36.409 65.698,36.379 65.74,36.352 65.784,36.331 65.827,36.32 65.549,36.068 65.543,36.112 65.526,36.159 65.503,36.203
no net on B.Cu "B.Cu--214" (solid, remove dead copper, pour order 808): 136.99,47.312 136.688,47.27 136.682,47.318 136.674,47.363 136.658,47.403 136.646,47.421 136.629,47.439 137.001,47.49 136.989,47.469 136.982,47.448 136.978,47.405 136.982,47.36
no net on B.Cu "B.Cu--212" (solid, remove dead copper, pour order 807): 82.066,47.288 82.22,47.552 82.261,47.526 82.301,47.504 82.342,47.492 82.365,47.49 82.388,47.493 82.198,47.169 82.189,47.192 82.177,47.21 82.146,47.24 82.108,47.264
no net on B.Cu "B.Cu--211" (solid, remove dead copper, pour order 806): 168.002,29.94 167.699,29.979 167.706,30.027 167.711,30.072 167.706,30.115 167.699,30.136 167.688,30.157 168.059,30.109 168.043,30.091 168.03,30.073 168.015,30.033 168.007,29.988
no net on B.Cu "B.Cu--210" (solid, remove dead copper, pour order 805): 166.04,44.151 165.735,44.148 165.739,44.223 165.743,44.288 165.74,44.318 165.733,44.348 165.719,44.377 165.697,44.408 166.071,44.41 166.05,44.38 166.036,44.351 166.03,44.321 166.028,44.291 166.034,44.226
no net on B.Cu "B.Cu--209" (solid, remove dead copper, pour order 804): 133.325,29.994 133.025,30.048 133.035,30.096 133.041,30.141 133.039,30.184 133.033,30.205 133.022,30.227 133.391,30.16 133.374,30.144 133.36,30.126 133.343,30.086 133.334,30.042
no net on B.Cu "B.Cu--201" (solid, remove dead copper, pour order 803): 115.258,27.227 114.999,27.066 114.974,27.108 114.949,27.145 114.918,27.175 114.899,27.187 114.877,27.196 115.194,27.394 115.193,27.37 115.195,27.349 115.208,27.307 115.231,27.268
no net on B.Cu "B.Cu--200" (solid, remove dead copper, pour order 802): 156.048,21.331 155.726,21.537 155.74,21.564 155.755,21.586 155.761,21.604 155.757,21.612 155.747,21.62 156.092,21.724 156.07,21.673 156.055,21.625 156.048,21.58 156.044,21.534 156.046,21.44
no net on B.Cu "B.Cu--199" (solid, remove dead copper, pour order 801): 231.159,63.257 230.879,63.377 230.898,63.422 230.915,63.464 230.922,63.506 230.921,63.529 230.915,63.552 231.26,63.404 231.239,63.392 231.222,63.378 231.196,63.343 231.178,63.302
no net on B.Cu "B.Cu--195" (solid, remove dead copper, pour order 800): 56.791,53.443 56.895,53.73 56.941,53.712 56.984,53.698 57.027,53.693 57.048,53.696 57.071,53.703 56.944,53.35 56.931,53.37 56.915,53.387 56.879,53.41 56.837,53.427
no net on B.Cu "B.Cu--194" (solid, remove dead copper, pour order 799): 84.481,69.339 84.198,69.227 84.181,69.272 84.163,69.314 84.138,69.349 84.122,69.364 84.101,69.376 84.45,69.515 84.443,69.492 84.441,69.469 84.447,69.427 84.463,69.384
no net on B.Cu "B.Cu--193" (solid, remove dead copper, pour order 798): 160.423,17.508 160.626,17.508 160.633,17.461 160.653,17.415 160.68,17.373 160.712,17.333 160.337,17.333 160.369,17.373 160.396,17.415 160.416,17.461
no net on B.Cu "B.Cu--191" (solid, remove dead copper, pour order 797): 185.084,27.006 184.78,27.032 184.785,27.08 184.787,27.125 184.781,27.168 184.773,27.188 184.76,27.209 185.134,27.178 185.118,27.16 185.106,27.141 185.093,27.1 185.087,27.055
no net on B.Cu "B.Cu--190" (solid, remove dead copper, pour order 796): 144.209,20.237 143.853,20.237 143.859,20.29 143.869,20.332 143.87,20.351 143.868,20.37 143.859,20.39 143.843,20.412 144.218,20.412 144.203,20.39 144.194,20.37 144.191,20.351 144.193,20.332 144.203,20.29
no net on B.Cu "B.Cu--185" (solid, remove dead copper, pour order 795): 153.378,47.81 153.076,47.764 153.07,47.812 153.061,47.857 153.045,47.896 153.032,47.915 153.015,47.932 153.385,47.989 153.374,47.967 153.368,47.946 153.364,47.903 153.369,47.858
no net on B.Cu "B.Cu--184" (solid, remove dead copper, pour order 794): 232.134,46.749 231.868,46.899 231.894,46.941 231.914,46.981 231.926,47.023 231.927,47.045 231.924,47.069 232.251,46.884 232.228,46.874 232.21,46.862 232.181,46.83 232.158,46.792
no net on B.Cu "B.Cu--183" (solid, remove dead copper, pour order 793): 120.621,45.289 120.321,45.234 120.313,45.282 120.303,45.326 120.285,45.365 120.273,45.383 120.254,45.4 120.624,45.468 120.613,45.446 120.606,45.425 120.605,45.382 120.611,45.337
no net on B.Cu "B.Cu--181" (solid, remove dead copper, pour order 792): 203.719,86.628 204.024,86.635 204.024,86.587 204.027,86.542 204.038,86.5 204.049,86.481 204.064,86.461 203.689,86.451 203.703,86.471 203.712,86.491 203.721,86.533 203.722,86.578
no net on B.Cu "B.Cu--172" (solid, remove dead copper, pour order 791): 141.002,20.036 140.799,20.036 140.792,20.084 140.772,20.13 140.745,20.172 140.714,20.211 141.089,20.211 141.057,20.172 141.029,20.13 141.01,20.084
no net on B.Cu "B.Cu--170" (solid, remove dead copper, pour order 790): 239.834,35.934 239.826,36.187 239.87,36.193 239.918,36.207 239.963,36.229 239.999,36.253 240.011,35.879 239.973,35.902 239.927,35.919 239.878,35.93
no net on B.Cu "B.Cu--169" (solid, remove dead copper, pour order 789): 65.992,40.209 66.248,40.376 66.273,40.335 66.299,40.298 66.331,40.269 66.35,40.258 66.373,40.249 66.059,40.043 66.061,40.067 66.058,40.09 66.044,40.13 66.02,40.169
no net on B.Cu "B.Cu--168" (solid, remove dead copper, pour order 788): 133.315,79.575 133.014,79.526 133.007,79.574 132.997,79.618 132.981,79.658 132.968,79.676 132.951,79.693 133.321,79.753 133.309,79.732 133.303,79.711 133.3,79.668 133.305,79.623
no net on B.Cu "B.Cu--163" (solid, remove dead copper, pour order 787): 141.775,19.971 141.572,19.861 141.57,19.885 141.563,19.909 141.54,19.959 141.507,20.004 141.47,20.036 141.828,20.146 141.791,20.061 141.78,20.017
no net on B.Cu "B.Cu--159" (solid, remove dead copper, pour order 786): 116.331,41.414 116.027,41.404 116.029,41.481 116.032,41.546 116.029,41.576 116.022,41.605 116.006,41.635 115.983,41.665 116.358,41.671 116.337,41.641 116.324,41.612 116.317,41.583 116.317,41.553 116.324,41.487
no net on B.Cu "B.Cu--158" (solid, remove dead copper, pour order 785): 156.048,20.644 155.692,20.644 155.698,20.697 155.707,20.739 155.71,20.758 155.707,20.777 155.698,20.797 155.683,20.819 156.058,20.819 156.041,20.797 156.033,20.777 156.031,20.758 156.032,20.739 156.041,20.697
no net on B.Cu "B.Cu--155" (solid, remove dead copper, pour order 784): 170.174,46.382 169.871,46.421 169.878,46.47 169.882,46.515 169.878,46.557 169.871,46.578 169.859,46.599 170.231,46.551 170.214,46.534 170.202,46.516 170.186,46.476 170.179,46.431
no net on B.Cu "B.Cu--153" (solid, remove dead copper, pour order 783): 103.848,41.359 103.608,41.17 103.579,41.209 103.55,41.244 103.517,41.271 103.496,41.28 103.473,41.286 103.767,41.518 103.768,41.494 103.773,41.472 103.791,41.433 103.817,41.397
no net on B.Cu "B.Cu--151" (solid, remove dead copper, pour order 782): 127.723,62.555 127.422,62.509 127.415,62.557 127.406,62.601 127.39,62.641 127.377,62.66 127.36,62.677 127.731,62.733 127.72,62.712 127.713,62.691 127.71,62.648 127.715,62.603
no net on B.Cu "B.Cu--150" (solid, remove dead copper, pour order 781): 64.511,75.619 64.735,75.827 64.767,75.791 64.799,75.759 64.835,75.736 64.856,75.728 64.879,75.724 64.606,75.467 64.603,75.492 64.597,75.513 64.575,75.55 64.545,75.584
no net on B.Cu "B.Cu--146" (solid, remove dead copper, pour order 780): 168.751,92.373 169.05,92.43 169.059,92.381 169.069,92.337 169.086,92.298 169.099,92.28 169.118,92.264 168.749,92.194 168.759,92.216 168.765,92.237 168.768,92.28 168.761,92.325
no net on B.Cu "B.Cu--141" (solid, remove dead copper, pour order 606): 23 vertices, not listed, extent 134.375,24.093 142.692,27.499
no net on B.Cu "B.Cu--138" (solid, remove dead copper, pour order 779): 209.488,53.99 209.195,54.075 209.209,54.121 209.221,54.165 209.223,54.208 209.218,54.23 209.21,54.253 209.57,54.148 209.551,54.134 209.536,54.117 209.515,54.08 209.501,54.037
no net on B.Cu "B.Cu--134" (solid, remove dead copper, pour order 778): 54.858,53.217 54.824,52.913 54.755,52.929 54.691,52.941 54.661,52.942 54.632,52.937 54.602,52.927 54.573,52.908 54.594,53.282 54.625,53.256 54.655,53.239 54.683,53.229 54.713,53.225 54.778,53.224 54.815,53.222
no net on B.Cu "B.Cu--133" (solid, remove dead copper, pour order 777): 81.328,82.059 81.549,82.27 81.582,82.234 81.614,82.203 81.65,82.179 81.672,82.171 81.695,82.167 81.424,81.908 81.421,81.932 81.415,81.953 81.393,81.99 81.363,82.024
no net on B.Cu "B.Cu--130" (solid, remove dead copper, pour order 776): 32.07,58.737 32.371,58.782 32.378,58.734 32.386,58.69 32.402,58.65 32.415,58.631 32.432,58.615 32.061,58.559 32.073,58.581 32.079,58.601 32.083,58.644 32.078,58.689
no net on B.Cu "B.Cu--129" (solid, remove dead copper, pour order 775): 262.947,60.066 262.941,60.32 262.985,60.325 263.032,60.339 263.078,60.359 263.114,60.385 263.123,60.01 263.086,60.033 263.04,60.051 262.991,60.062
no net on B.Cu "B.Cu--128" (solid, remove dead copper, pour order 774): 237.39,74.188 237.695,74.177 237.692,74.128 237.692,74.083 237.701,74.041 237.71,74.021 237.724,74.001 237.349,74.014 237.364,74.033 237.375,74.052 237.386,74.094 237.389,74.139
no net on B.Cu "B.Cu--127" (solid, remove dead copper, pour order 773): 159.734,17.671 159.937,17.592 159.942,17.545 159.957,17.501 160.001,17.417 159.634,17.496 159.671,17.531 159.702,17.574 159.725,17.623 159.731,17.648
no net on B.Cu "B.Cu--123" (solid, remove dead copper, pour order 772): 186.494,90.101 186.795,90.154 186.802,90.106 186.811,90.062 186.829,90.022 186.842,90.004 186.859,89.988 186.49,89.923 186.501,89.944 186.507,89.966 186.509,90.009 186.503,90.053
no net on B.Cu "B.Cu--121" (solid, remove dead copper, pour order 771): 50.677,31.147 50.574,30.86 50.528,30.877 50.485,30.891 50.443,30.896 50.421,30.893 50.397,30.886 50.524,31.239 50.537,31.219 50.552,31.203 50.588,31.179 50.631,31.163
no net on B.Cu "B.Cu--117" (solid, remove dead copper, pour order 770): 177.3,62.008 176.996,62.035 177.001,62.083 177.003,62.128 176.997,62.171 176.99,62.192 176.976,62.212 177.35,62.179 177.334,62.161 177.323,62.142 177.309,62.101 177.304,62.056
no net on B.Cu "B.Cu--115" (solid, remove dead copper, pour order 769): 201.799,21.939 201.497,21.983 201.505,22.031 201.51,22.076 201.506,22.119 201.499,22.14 201.487,22.162 201.859,22.108 201.842,22.09 201.829,22.072 201.814,22.032 201.805,21.988
no net on B.Cu "B.Cu--114" (solid, remove dead copper, pour order 768): 156.048,21.497 155.692,21.497 155.698,21.551 155.707,21.593 155.71,21.612 155.707,21.631 155.698,21.651 155.683,21.672 156.058,21.672 156.041,21.651 156.033,21.631 156.031,21.612 156.032,21.593 156.041,21.551
no net on B.Cu "B.Cu--112" (solid, remove dead copper, pour order 767): 271.447,73.933 271.459,74.187 271.503,74.189 271.552,74.2 271.598,74.217 271.637,74.239 271.619,73.865 271.584,73.891 271.538,73.912 271.491,73.927
no net on B.Cu "B.Cu--111" (solid, remove dead copper, pour order 766): 90.663,18.951 90.394,18.808 90.372,18.852 90.349,18.891 90.321,18.923 90.302,18.936 90.281,18.947 90.612,19.122 90.609,19.098 90.609,19.076 90.62,19.034 90.64,18.994
no net on B.Cu "B.Cu--105" (solid, remove dead copper, pour order 765): 115.561,90.424 115.839,90.546 115.859,90.501 115.878,90.461 115.904,90.426 115.922,90.412 115.942,90.4 115.599,90.249 115.604,90.273 115.605,90.295 115.598,90.337 115.581,90.379
no net on B.Cu "B.Cu--104" (solid, remove dead copper, pour order 764): 67.846,6.602 67.562,6.489 67.545,6.534 67.527,6.575 67.502,6.611 67.485,6.625 67.465,6.638 67.813,6.778 67.806,6.755 67.804,6.732 67.811,6.69 67.826,6.648
no net on B.Cu "B.Cu--101" (solid, remove dead copper, pour order 763): 35.144,62.224 34.89,62.224 34.885,62.268 34.873,62.316 34.853,62.362 34.829,62.399 35.204,62.399 35.18,62.362 35.161,62.316 35.148,62.268